# Altium PCB pcbDriverEsq.PcbDoc
Units mm, origin at the board's own origin, x right, y up, seen from the top; angles counter-clockwise.
Board outline 13.35 x 27.94 mm, 2 copper layers (Top Layer, Bottom Layer); 14 components, 11 nets, 49 pads, 11 vias.
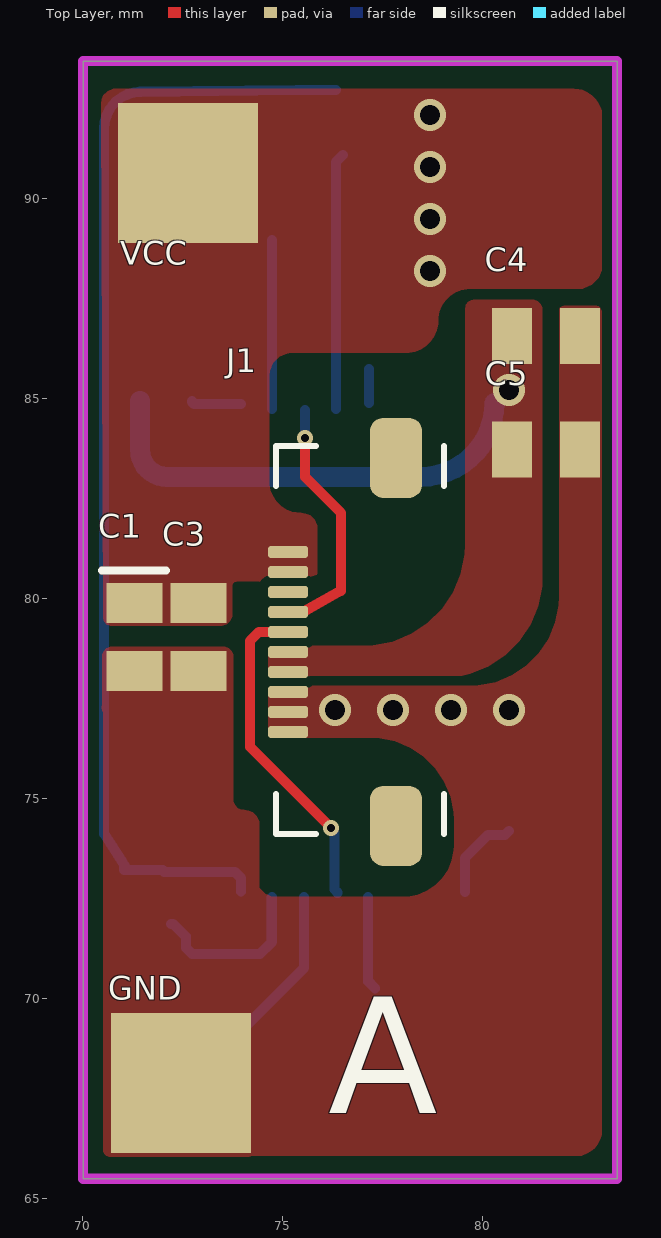
[diagram p0: Top Layer view]
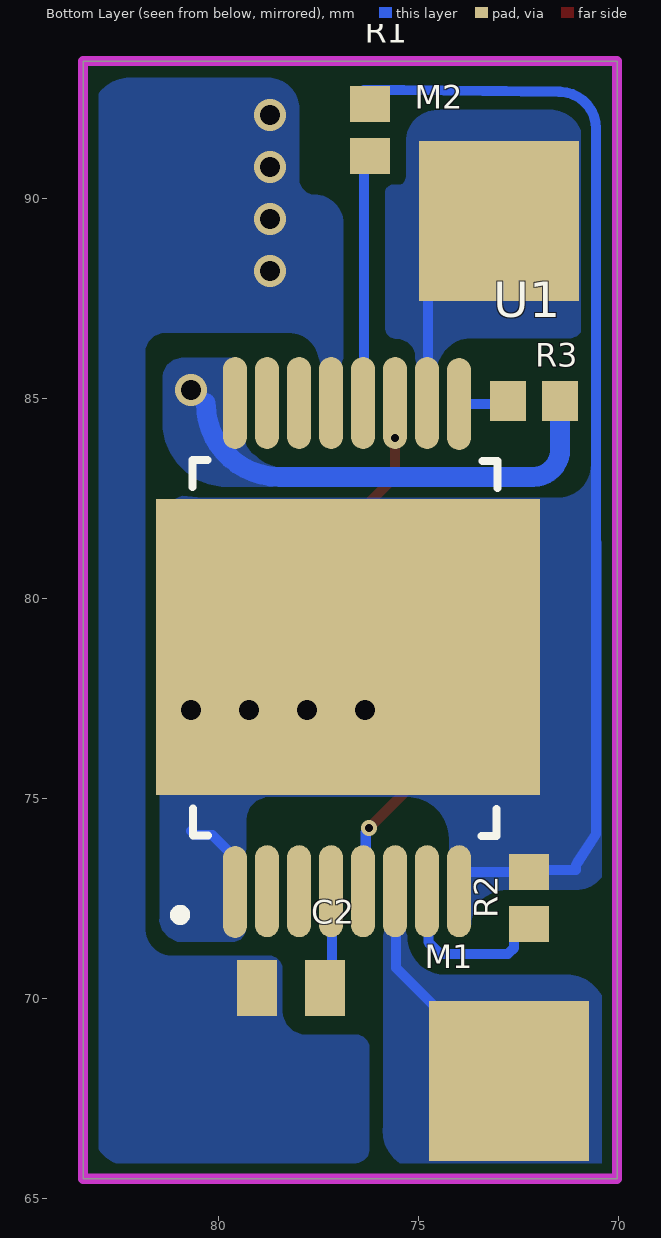
[diagram p1: Bottom Layer view, seen from below]
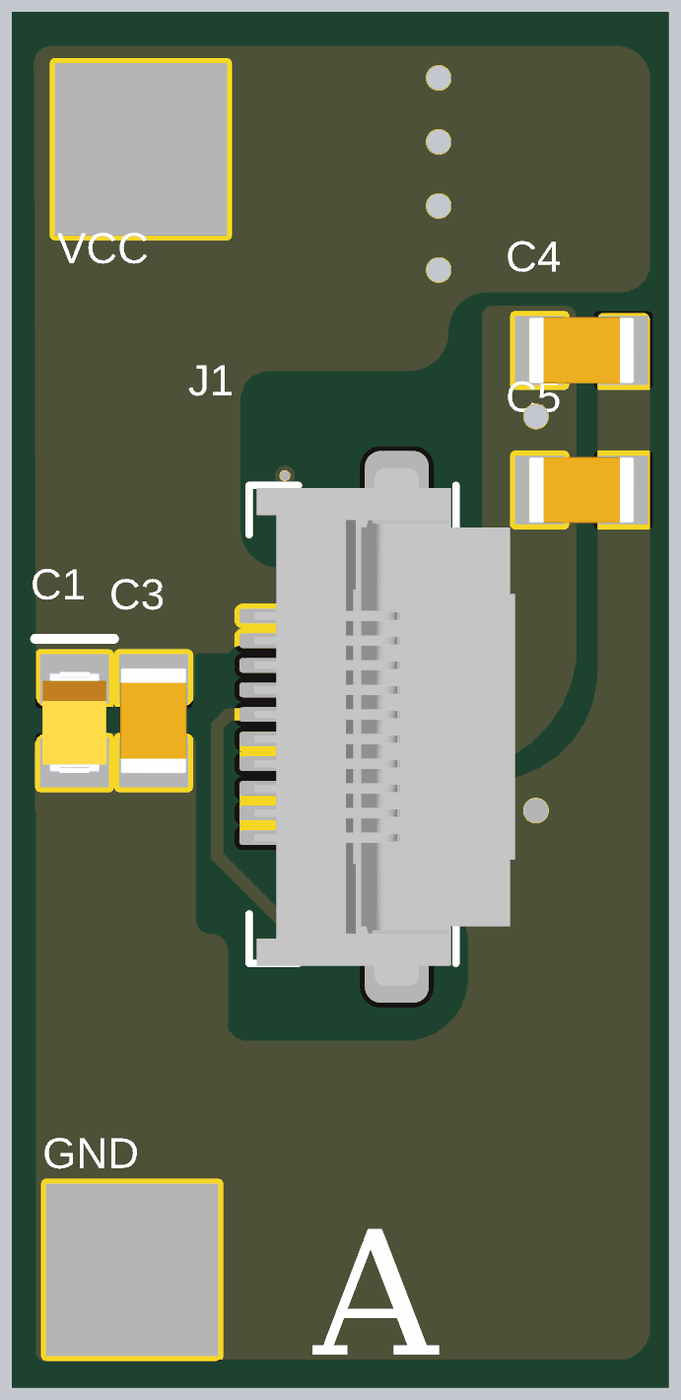
[diagram p2: 3D render of the assembled board from above, using the file's embedded part models]
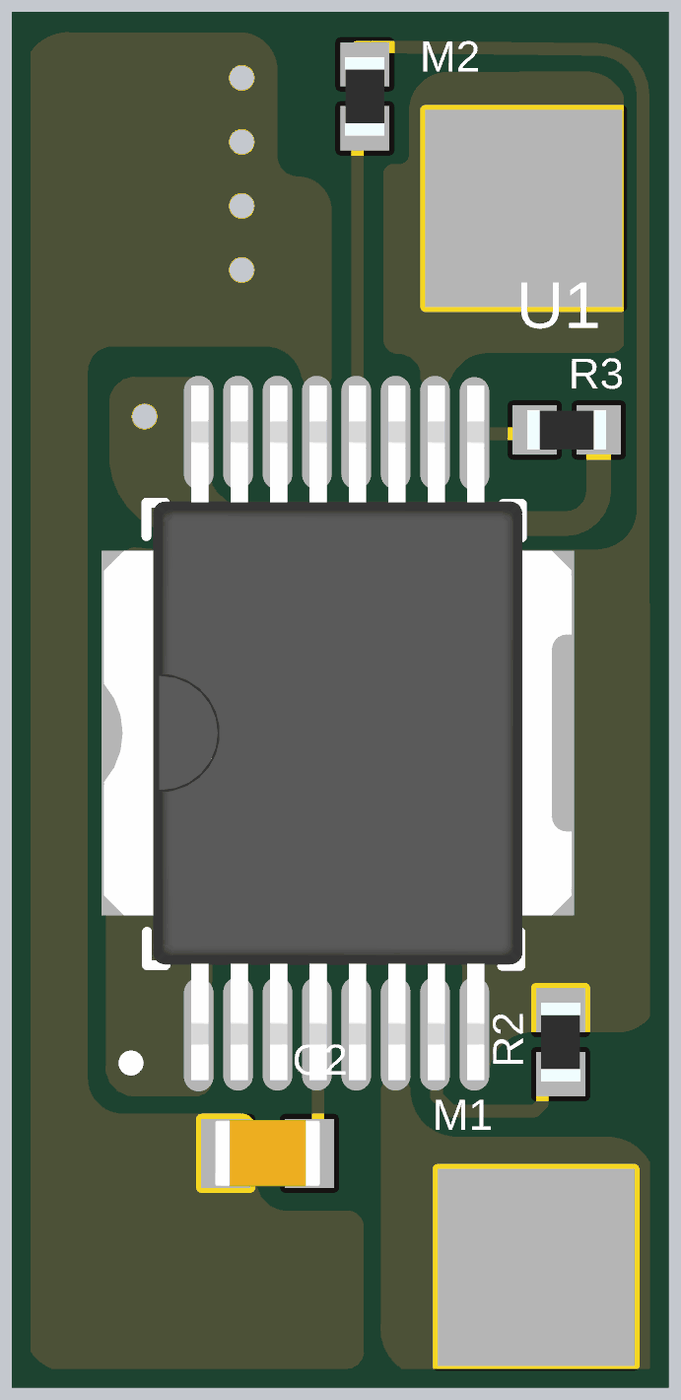
[diagram p3: 3D render of the assembled board from below, using the file's embedded part models]

## Layer stack, top to bottom
Top Solder: solder mask 0.0102, Solder Resist, Dk 3.5
Top Layer: signal copper 0.0356
Dielectric 1: dielectric 0.32, FR-4, Dk 4.8
Bottom Layer: signal copper 0.0356
Bottom Solder: solder mask 0.0102, Solder Resist, Dk 3.5

## Board outline
70.025,65.505 83.375,65.505 83.375,93.445 70.025,93.445

## Design rules (kind name [scope] priority, off if disabled: settings)
Clearance [All] p1: gap=0.254 ignorepadtopadclearanceinfootprint=FALSE except(0.1: Arc-Arc Arc-Track Arc-SMDPad Arc-THPad Arc-Via Track-Track Track-SMDPad Track-THPad Track-Via SMDPad-SMDPad)
PolygonConnect [All] p1: connectstyle=Direct reliefconductorwidth=0.254 reliefentries=4 polygonreliefangle="90 Angle" airgapwidth=0.254
RoutingVias [All] p1: holewidth=0.711 width=1.27 viastyle="Through Hole" minholewidth=0.711 minwidth=1.27 maxholewidth=0.711 maxwidth=1.27
SolderMaskExpansion [All] p1: expansion=0.102 istentingtop=FALSE
Width [All] p1: maxlimit=1 minlimit=0.254 preferedwidth=0.254 toplayer_maxwidth=0.254 minimp=50.000000 maximp=50.000000 favimp=50.000000
30 further rules are at their usual default settings.

## Components (designator, comment, footprint, x,y, rotation, side; value= is the part's Value field where it differs from the comment)
C1 "100uF" "TANTALUM C0805" 71.325,79.075 r270 top
C2 "0.1uF" C0805 78.175,70.275 r180 bottom
C3 "1 uF" C0805 72.9,79.05 r90 top
C4 "0.1uF" C0805 81.6,86.575 r0 top
C5 "10uF" C0805 81.6,83.725 r180 top
GND "Ground Pad" PAD_ALIMENTAÇÃO_MINI 72.475,67.9 r0 top (schematic designator GND1)
J1 "505278-1033" FPC_CON 76.75,78.925 r90 top
M1 "Motor Pad" PAD_MOTOR_MINI 72.725,67.95 r180 bottom
M2 "Motor Pad" PAD_MOTOR_MINI 72.975,89.45 r180 bottom
R1 "10kR" RESISTOR_0603 76.2,91.725 r270 bottom
R2 "22 kOhms" RESISTOR_0603 72.225,72.525 r270 bottom
R3 "22 kOhms" RESISTOR_0603 72.1,84.95 r0 bottom
U1 "L9958SBTR" "POWERSO16 (16_PINS)" 76.725,78.8 r90 bottom
VCC "Source Pad" PAD_ALIMENTAÇÃO_MINI 72.65,90.65 r0 top (schematic designator VCC1)

## Footprints (in the part's own frame and the unit in brackets; to place one, negate y for a bottom-side part, rotate by r counter-clockwise, add the part's x,y. Pads: shape width x height; smd on the part's side, far side on the other; paste and mask are expansions set on the pad)
C0805 [mm]
  rect 1x1.4 smd: 1(-0.85,-0.008) 2(0.85,-0.008)
  body extent -1.07,-0.68 1.07,0.67, height 0.9
FPC_CON [mm] "Small Outline IC (SOIC), 1.27 mm pitch; 8 pin, 4.90 mm L X 3.90 mm W X 1.75 mm H body"
  rrect50% 0.3x1 smd: 1(-2.25,1.6) 2(-1.75,1.6) 3(-1.25,1.6) 4(-0.75,1.6) 5(-0.25,1.6) 6(0.25,1.6) 7(0.75,1.6) 8(1.25,1.6) 9(1.75,1.6) 10(2.25,1.6)
  rrect50% 2x1.3 smd: MP1(-4.6,-1.1) MP2(4.6,-1.1)
  silkscreen extent -4.8,-2.3 4.9,1.9, body extent -5.25,-3.5 5.25,1.8, height 1.88
PAD_ALIMENTAÇÃO_MINI [mm]
  rect 3.5x3.5 smd: A(0,0)
PAD_MOTOR_MINI [mm]
  rect 4x4 smd: M(0,0)
"POWERSO16 (16_PINS)" [mm]
  oval 2.3x0.6 smd paste+0 mask+0: 1(-6.125,2.85) 2(-6.108,2.05) 3(-6.108,1.25) 4(-6.108,0.45) 5(-6.108,-0.35) 6(-6.108,-1.15) 7(-6.108,-1.95) 8(-6.108,-2.75) 9(6.075,-2.75) 10(6.1,-1.95) 11(6.1,-1.15) 12(6.1,-0.35) 13(6.1,0.45) 14(6.1,1.25) 15(6.1,2.05) 16(6.1,2.85)
  rect 7.4x9.6 smd paste+0 mask+0: 17(0,0.025)
  silkscreen extent -6.8,-3.71 4.68,4.33, body extent -7.05,-4.72 7.05,4.78
RESISTOR_0603 [mm]
  rect 0.9x1 smd: 1(-0.65,0) 2(0.65,0)
  body extent -0.8,-0.4 0.8,0.4, height 0.55
"TANTALUM C0805" [mm]
  rect 1x1.4 smd: 1(-0.824,-0.02) 2(0.876,-0.02)
  silkscreen extent -1.64,-0.82 -1.64,0.78, body extent -0.96,-0.67 1.09,0.63, height 1.2

## Part data
C1: library part F980J107MSA, "CAP TAN 100uF 6.3V 0805", Manufacturer=AVX, Operating Temperature="-55 C ~ 125 C", Package / Case="0805 (2012 Metric)", Supplier Part Number 1=581-F980J107MSA, Tolerance=20%, Voltage - Rated=6.3V, Category="Tantalum Capacitor", ComponentLink1Description=Datasheet, ComponentLink1URL=https://br.mouser.com/datasheet/2/40/AVX_F98%20DTSH%2008_16-1158749.pdf, ComponentLink2Description="Mouser Link", ComponentLink2URL=https://br.mouser.com/ProductDetail/AVX/F980J107MSA?qs=%2Fha2pyFaduiqmyJM1RWxJ6tWf%252BqxluChd36%252Bz6k56%252ByF7CmEPS5MIQ%3D%3D, Dieletric=Tantalum, ESR="8 Ohms using (100kHz)", Library Control - Checked Footprint=Yes, Library Control - Checked Schematic=Yes, Library Control - Last Update="27/06/2021 23:37", Library Control - Person that Checked Footprint=Nikaum, Library Control - Person that Checked Schematic=Nikaum, Library Control - Person that did the Last Update Footprint=Nikaum, Library Control - Person that did the Last Update Schematic=Nikaum, Library Ref=Capacitor, Part Number=F980J107MSA, Price="1=0.87, 10=0.646, 100=0.443 (USD)", Size / Dimension="2,00 L x 1,25 W x 0,80 H", Supplier 1=Mouser
C2 C4: library part C0805C104M3RACTU, "CAP CER 100nF 25V X7R 0805", Manufacturer=Kemet, Operating Temperature="-55 C ~ 125 C", Package / Case="0805(2012 mestric)", Supplier Part Number 1=80-C0805C104M3R, Tolerance=20%, Voltage - Rated="25 VDC", Category="Ceramic Capacitor", ComponentLink1Description=Datasheet, ComponentLink1URL=https://br.mouser.com/datasheet/2/212/KEM_C1002_X7R_SMD-1102033.pdf, ComponentLink2Description="Mouser Link", ComponentLink2URL=https://br.mouser.com/ProductDetail/KEMET/C0805C104M3RACTU?qs=jbCUrP3sAgSIdMuvv9W4Pg%3D%3D, Dieletric=X7R, ESR=-, Library Control - Checked Footprint=Yes, Library Control - Checked Schematic=Yes, Library Control - Last Update=25/08/22, Library Control - Person that Checked Footprint=Cage, Library Control - Person that Checked Schematic=Cage, Library Control - Person that did the Last Update Footprint=Cage, Library Control - Person that did the Last Update Schematic=Cage, Library Ref=Capacitor, Part Number=C0805C104M3RACTU, Price="1=0,13 10=0,064 100=0,037 1000=0,025 (USD)", Size / Dimension="1.25 mm W x 2 mm L x 0.78 mm H", Supplier 1=Mouser
C3: library part 08051C105K4T2A, "CAP CER 1uF 100V X7R 0805", Manufacturer="KYOCERA AVX", Operating Temperature="-55°C ~125ºC", Package / Case="0805(2012 Metric)", Supplier Part Number 1=581-08051C105K4T2A, Tolerance=10%, Voltage - Rated="100 VDC", Category="Ceramic capacitor", ComponentLink1Description=Datasheet, ComponentLink1URL=https://br.mouser.com/datasheet/2/40/AutoMLCC-777028.pdf, ComponentLink2Description="Mouser Link", ComponentLink2URL=https://br.mouser.com/ProductDetail/KYOCERA-AVX/08051C105K4T2A?qs=BZBei1rCqCBHLdlOVwQkfA%3D%3D, Dieletric=X7R, ESR=-, Library Control - Checked Footprint=Yes, Library Control - Checked Schematic=Yes, Library Ref=Capacitor, Part Number=08051C105K4T2A, Price="1=0,41 10=0,283 100=0,169 1000=0,107 (USD)", Size / Dimension="2 mm L  x 1.25 mm W x 1.25 mm H", Supplier 1=Mouser
C5: library part EMK212BB7106MG-T, "CAP CER 10uF 16V X7R 0805", Manufacturer="Taiyo Yuden", Operating Temperature=-55°C~+125°C, Package / Case=0805, Supplier Part Number 1=963-EMK212BB7106MG-T, Tolerance=20%, Voltage - Rated="16V DC", Category="Ceramic Capacitors", ComponentLink1Description=Datasheet, ComponentLink1URL=https://br.mouser.com/datasheet/2/396/mlcc02_e-1307760.pdf, ComponentLink2Description="Mouser Link", ComponentLink2URL=https://br.mouser.com/ProductDetail/Taiyo-Yuden/EMK212BB7106MG-T?qs=sGAEpiMZZMsh%252B1woXyUXj9%252BEWUGdOab8mJU%252BgghcgP8%3D, Dieletric=X7R, Library Control - Checked Footprint=Yes, Library Control - Checked Schematic=Yes, Library Control - Last Update=22/08/22, Library Control - Person that Checked Footprint=Cage, Library Control - Person that Checked Schematic=Cage, Library Control - Person that did the Last Update Footprint=Chico, Library Control - Person that did the Last Update Schematic=Cage, Library Ref=Capacitor, Part Number=EMK212BB7106MG-T, Price="1=0.42, 10=0.204, 100=0.175 (USD)", Size / Dimension="1.25mm X 2mm X 1.45mm", Supplier 1=Mouser
GND: library part "Ground Pad Mini Sumô", "GND PAD MINI SUMÔ", Cable AWG="20 / 18 (AWG)", Library Ref=Pads, Recomended Category="Mini Sumô", Size="3.5 x 3.5 (mm)"
J1: library part 505278-1033_BODY, "CONN FFC/FPC HORZ 10POS 0.50MM", Current Rating (Amps)=500mA, Manufacturer=Molex, Operating Temperature="-40°C ~ 85°C", Supplier Part Number 1=538-505278-1033, Category=Connectors, ComponentLink1Description=Datasheet, ComponentLink1URL=https://br.mouser.com/datasheet/2/276/2/5052781033_FFC_FPC_CONNECTORS-772019.pdf, ComponentLink2Description="Mouser Link", ComponentLink2URL=https://br.mouser.com/ProductDetail/Molex/505278-1033?qs=c8NFF48pVsDStgrQCBOSTg%3D%3D, Contact Length - Mating=0.50mm, Contact Material=Tin, Contact Type=FFC/FPC, Insulation Material="Liquid Crystal Polymer", Library Control - Checked Footprint=Yes, Library Control - Checked Schematic=Yes, Library Control - Last Project that Used=Follow-Final, Library Control - Last Update="24/04/2021 00:25", Library Control - Person that Checked Footprint=Lucas, Library Control - Person that Checked Schematic=Lucas, Library Control - Person that did the Last Update Footprint=Mateus(Dimas), Library Control - Person that did the Last Update Schematic=Mateus(Dimas), Library Ref=Connectors, Mounting Type="Right Angle", Number of Positions=10, Number of Rows=1, Part Number=505278-1033, Pitch=0.50mm, Price="1=0,51000, 10=0,42900, 100=0,33400 (USD)", Supplier 1=Mouser, Termination=SMD
M1 M2: library part "Motor Pad Mini Sumô", "MOTOR PAD MINI SUMÔ", Cable AWG="20 / 18 (AWG)", Library Ref=Pads, Recomended Category="Mini Sumô", Size="3.5 x 3.5 (mm)"
R1: library part RC0603JR-0710KL, "RES SMD 10K OHM 5% 1/10W 0603", Manufacturer=Yageo, Operating Temperature="- 55ºC ~ 155ºC", Package / Case="0603 (1608 Metric)", Power Rating="100 mW (1/10 W)", Resistor Type=Fixo, Supplier Part Number 1=603-RC0603JR-0710KL, Temperature Coefficient="100 PPM / C", Tolerance="5 %", Voltage Rating="75 V", Category="Thick Film Resistors - SMD", ComponentLink1Description="Mouser Link", ComponentLink1URL=https://br.mouser.com/ProductDetail/Yageo/RC0603JR-0710KL?qs=ksOUTF%2FWcd8D6T22BJkQ7g%3D%3D, ComponentLink2Description="Datsheet Link", ComponentLink2URL=https://br.mouser.com/datasheet/2/447/Yageo_03_18_2021_PYu_RC_Group_51_RoHS_L_11-2199992.pdf, Library Control - Checked Footprint=No, Library Control - Checked Schematic=Yes, Library Control - Last Update="21/06/21 14:15", Library Control - Person that Checked Schematic=Marcos, Library Control - Person that did the Last Update Footprint=Dalarme, Library Control - Person that did the Last Update Schematic=Marcos, Library Ref=Resistor, Part Number=RC0603JR-0710KL, Price="1=0,10, 10=0,015, 100=0,005 1000=0,0040 (USD)", Size / Dimension="1.6 mm L x  0.8 mm W x  0.45 mm H", Supplier 1=Mouser
R2 R3: library part CRGH0603F22K, "RES SMD 22K OHM 1% 1/5W 0603", Manufacturer="TE Connectivity / Holsworthy", Operating Temperature=-55C~155C, Package / Case="0603 (1608 metric)", Power Rating="200 mW (1/5 W)", Resistor Type=Fixo, Supplier Part Number 1=279-CRGH0603F22K, Temperature Coefficient="100 PPM / C", Tolerance=1%, Voltage Rating="50 V", Category="Thick Film Resistors", ComponentLink1Description="Mouser Link", ComponentLink1URL=https://br.mouser.com/ProductDetail/TE-Connectivity-Holsworthy/CRGH0603F22K?qs=j1jvDfvplqKqyIzG56xhJw%3D%3D, ComponentLink2Description=Datasheet, ComponentLink2URL=https://br.mouser.com/datasheet/2/418/6/ENG_DS_1773204_1_F-1140248.pdf, Library Ref=Resistor, Part Number=CRGH0603F22K, Price="1= 0.10, 10= 0.07, 100= 0.027 (USD)", Size / Dimension="0.45 mm x 1.6 mm x 0.8 mm (HxLxW)", Supplier 1=Mouser
U1: "IC MTR DRV (4V ~ 28V) (100 uA) POWERSO 16", Current - Output="100 uA", Current - Peak Output (Source/Sink)="5 uA / 100 uA", Logic Voltage - VIL, VIH="VIL = (-0.3 V ~ 0.8 V) / VIH = (2 V ~ VDD + 0.3 V)", Manufacturer=ST, Operating Supply Current="20 uA", Operating Temperature="-40°C ~ 150°C", Package / Case="POWERSO 16", Power Dissipation="625 mW", Rds On - Drain-Source Resistance="300 mOhms", Supplier Part Number 1=511-L9958SBTR, Voltage - Load="4V ~ 28V", Voltage - Supply="4.5 V ~ 5.5 V", Category=Driver, ComponentLink1Description="Mouser Link / ST Link", ComponentLink1URL=https://estore.st.com/en/l9958sbtr-cpn.html, ComponentLink2Description=Datasheet, ComponentLink2URL=https://www.st.com/resource/en/datasheet/l9958.pdf, Library Control - Checked Footprint=Yes, Library Control - Checked Schematic=Yes, Library Control - Last Update="21/06/2021 12:25", Library Control - Person that Checked Footprint=Pierre, Library Control - Person that Checked Schematic=Pierre, Library Control - Person that did the Last Update Footprint=Stéfany(Ster), Library Control - Person that did the Last Update Schematic=Pierre, Library Ref=Driver, Logic (IN-SD/High Low)=IN-SD, Output Configuration="Half Bridge (2)", Part Number=L9958SBTR, Price="1=5,51000, 10=4,95000, 100=4,06000 (USD)", Rise / Fall Time (Typ)="0.2 us / 3 us", Suplier Part Number 2=L9958SBTR, Supplier 1=Mouser, Technology="Power MOSFET"
VCC: library part "Source Pad Mini Sumô", "VCC PAD MINI SUMÔ", Cable AWG="20 / 18 (AWG)", Library Ref=Pads, Recomended Category="Mini Sumô", Size="3.5 x 3.5 (mm)"

## Via types
v1: diameter 0.8, hole 0.5, Top Layer to Bottom Layer, tented both sides, 9 vias
v2: diameter 0.4, hole 0.2, Top Layer to Bottom Layer, tented both sides, 2 vias

## Nets (pads, with @x,y where several pads share a name; then routed paths per layer and width w, separated by ;. In a path a pad name is that pad's centre, name@x,y a point inside that pad or via, vN(x,y) a via of type N, cw(c..) or ccw(c..) an arc to the next point about the centre after c; other vN are vias at no path point)
BAT: C1.1 C2.1 C3.2 J1.9 J1.10 U1.13 VCC.A | length 0.9
  Bottom Layer w0.254: U1.13 U1.13@77.175,85.75
  other v1: 78.7,88.2 78.7,89.5 78.7,90.8 78.7,92.1
CP: C2.2 U1.4 | length 2.3
  Bottom Layer w0.254: U1.4@77.15,72.542 77.15,70.442 C2.2
DI: R2.2 U1.7 | length 4.2
  Bottom Layer w0.254: R2.2 72.275,71.875 72.598,71.552 72.598,71.277 72.75,71.125 74.45,71.125 74.744,71.419 74.744,72.535 U1.7@74.75,72.542
DIR: J1.6 U1.5 | length 8.2
  Top Layer w0.254: J1.6 74.425,79.175 74.2,78.95 74.2,76.3 v2(76.222,74.278)
  Bottom Layer w0.254: v2(76.222,74.278) 76.222,74.238 76.309,74.152 76.309,72.733 U1.5@76.388,72.654
EN: R3.2 U1.9 | length 1.3
  Bottom Layer w0.254: R3.2 ccw(c72.825,84.95) 72.825,84.875 U1.9
GND: C1.2 C3.1 C4.2 C5.1 GND.A J1.1 J1.2 J1.3 R1.1 R2.1 U1.1 U1.8 U1.17 | length 30.6
  Bottom Layer w0.254: U1.8 73.975,73.015 73.815,73.175 72.054,73.175 72.004,73.225 71.05,73.225 71.054,73.229 71.054,73.344 71.014,73.407 70.55,74.127 70.55,91.754 cw(c71.475,91.754) 71.454,92.678 cw(c71.475,91.754) 71.475,92.679 75.361,92.722 76.199,92.724 R1.1@76.35,92.724 ; U1.1 79.575,73.525 80.146,74.096 80.571,74.096 80.675,74.2
  other v1: 76.325,77.225 77.775,77.225 79.225,77.225 80.675,77.225
OUT1: M1.M U1.6 | length 5.8
  Bottom Layer w0.254: M1.M 75.55,70.775 U1.6@75.55,72.542
OUT2: M2.M U1.10 | length 4.2
  Bottom Layer w0.254: U1.10@74.75,84.75 M2.M@74.75,88.975
PWM: J1.7 U1.11 | length 6.3
  Top Layer w0.254: J1.7 75.566,79.701 76.475,80.204 76.475,82.15 75.575,83.05 v2(75.575,84.025)
  Bottom Layer w0.254: v2(75.575,84.025) U1.11@75.575,84.725
REXT: R1.2 U1.12 | length 6.4
  Bottom Layer w0.254: U1.12@76.35,84.75 76.35,90.925 R1.2@76.525,91.1
VDD: C4.1 C5.2 J1.4 J1.5 R3.1 U1.16 | length 11.5
  Bottom Layer w0.5: R3.1 71.45,83.725 ccw(c72.125,83.725) 72.125,83.05 78.462,83.05 ccw(c78.462,84.896) 80.309,84.896
  other v1: 80.675,85.225
pads on no net: J1.8 J1.MP1 J1.MP2 U1.2 U1.3 U1.14 U1.15

## Polygon pours and split planes (outlines as drawn)
BAT on Top Layer "BAT_L01_P075" (solid, pour order 75): 75.25,86.15 78.1,86.15 ccw(c78.1,86.95) 78.9,86.95 cw(c79.693,86.957) 79.7,87.75 82.4,87.75 ccw(c82.387,88.363) 83,88.375 83,92.05 ccw(c82.3,92.05) 82.3,92.75 74.465,92.75 ccw(c74.465,90.21) 71.925,90.21 71.925,85.7
VDD on Top Layer "VDD_L01_P074" (solid, pour order 74): 81.5,85.125 81.5,87.225 ccw(c81.25,87.225) 81.25,87.475 79.775,87.475 ccw(c79.8,87.25) 79.575,87.225 79.575,85.325
GND on Top Layer "GND_L01_P073" (solid, pour order 73): 79.3,73.836 cw(c78.014,73.836) 78.014,72.55 77.525,72.55 ccw(c78.975,72.55) 78.975,71.1 83.025,71.1 cw(c83.025,71.125) 83,71.125 83,75.025
GND on Top Layer "GND_L01_P070" (solid, pour order 70): 79.687,77.825 ccw(c79.687,80.062) 81.925,80.063 81.925,87.223 cw(c82.05,87.2) 82.072,87.325 82.838,87.325 cw(c82.852,87.191) 82.987,87.206 82.987,77.357
GND on Top Layer "GND_L01_P068" (solid, pour order 68): 77.05,77.825 82.325,77.825 cw(c82.325,77.125) 83.025,77.125 83.025,73.7 cw(c82.35,73.7) 82.35,73.025 80.2,73.025 cw(c80.2,73.925) 79.3,73.925 79.3,74.46 ccw(c77.235,74.46) 77.235,76.525 77.1,76.525 cw(c77.1,76.825) 76.8,76.825
VDD on Top Layer "VDD_L01_P069" (solid, pour order 69): 75.162,78.825 77.035,78.825 ccw(c77.035,81.365) 79.575,81.365 79.575,85.325 cw(c80.087,85.288) 80.125,85.8 80.975,85.8 cw(c81,85.3) 81.5,85.325 81.5,80.565 cw(c78.96,80.565) 78.96,78.025 75.137,78.025
GND on Top Layer "GND_L01_P061" (solid, pour order 61): 73.95,66.05 cw(c73.975,66.05) 73.975,66.075 82.425,66.075 ccw(c82.344,66.719) 82.987,66.8 82.987,71.887 ccw(c82.325,71.888) 82.325,72.55 72.725,72.55
BAT on Top Layer "BAT_L01_P051" (solid, pour order 51): 74.675,85.375 74.675,85.575 cw(c75.25,85.575) 75.25,86.15 74.525,86.15 cw(c74.525,86.25) 74.425,86.25
GND on Top Layer "GND_L01_P046" (solid, pour order 46): 74.881,72.532 cw(c74.881,73.082) 74.331,73.082 74.331,72.482 ccw(c74.431,72.482) 74.431,72.382
GND on Top Layer "GND_L01_P043" (solid, pour order 43): 74.125,66.05 ccw(c74.125,66.35) 74.425,66.35 74.425,74.35 ccw(c74.05,74.35) 74.05,74.725 cw(c74.05,75) 73.775,75 73.775,77.5 ccw(c73.715,77.5) 73.715,77.56 70.5,77.56 cw(c70.5,77.535) 70.525,77.535 70.525,66.225 ccw(c70.7,66.225) 70.7,66.05
GND on Top Layer "GND_L01_P036" (solid, pour order 36): 73.775,77.775 73.775,77.225 cw(c73.6,77.225) 73.6,77.05 70.8,77.05 cw(c70.766,77.389) 70.55,77.125 cw(c70.797,77.298) 70.5,77.35 70.5,77.77
GND on Top Layer "GND_L01_P032" (solid, pour order 32): 73.525,78.8 cw(c73.525,78.55) 73.775,78.55 73.775,77.775 cw(c73.55,77.775) 73.55,77.55 70.775,77.55 cw(c70.775,77.825) 70.5,77.825 70.5,78.55 cw(c70.75,78.55) 70.75,78.8
BAT on Top Layer "BAT_L01_P031" (solid, pour order 31): 74.703,89.232 74.675,89.125 74.675,89.75 75.15,89.75 ccw(c75.457,89.033)
BAT on Top Layer "BAT_L01_P030" (solid, pour order 30): 73.95,92.75 78.8,92.75 cw(c78.8,92.375) 79.175,92.375 79.175,90.2 cw(c78.725,90.2) 78.725,89.75 73.924,89.75 cw(c73.924,89.956) 73.719,89.973
BAT on Top Layer "BAT_L01_P029" (solid, pour order 29): 70.75,79.325 73.45,79.325 ccw(c73.45,79.625) 73.75,79.625 73.75,80.325 cw(c73.85,80.325) 73.85,80.425 75.625,80.425 ccw(c75.625,80.675) 75.875,80.675 75.875,81.75 ccw(c75.475,81.75) 75.475,82.15 cw(c75.475,82.95) 74.675,82.95 74.675,92.4 ccw(c74.325,92.4) 74.325,92.75 70.85,92.75 ccw(c70.85,92.375) 70.475,92.373 70.524,79.551 ccw(c70.75,79.552)
GND on Top Layer "GND_L01_P027" (solid, pour order 27): 75.187,76.525 77.2,76.525 ccw(c77.2,76.7) 77.375,76.7 77.375,77.675 ccw(c77.2,77.675) 77.29,77.825 75.235,77.825 ccw(c75.325,77.675) 75.15,77.675
VDD on Top Layer "VDD_L01_P004" (solid, pour order 4): 74.75,78.025 cw(c74.75,78.125) 74.65,78.125 74.65,78.7 cw(c74.775,78.7) 74.775,78.825 75.55,78.825 cw(c75.55,78.725) 75.65,78.725 75.65,78.15 cw(c75.525,78.15) 75.525,78.025
GND on Top Layer "GND_L01_P009" (solid, pour order 9): 74.8,76.525 cw(c74.8,76.675) 74.65,76.675 74.65,77.7 cw(c74.775,77.7) 74.775,77.825 75.575,77.825 cw(c75.575,77.75) 75.65,77.75 75.65,76.6 cw(c75.575,76.6) 75.575,76.525
BAT on Top Layer "BAT_L01_P011" (solid, pour order 11): 74.85,80.525 cw(c74.85,80.725) 74.65,80.725 74.65,81.2 cw(c74.775,81.2) 74.775,81.325 75.575,81.325 cw(c75.575,81.25) 75.65,81.25 75.65,80.6 cw(c75.575,80.6) 75.575,80.525
BAT on Bottom Layer "BAT_L02_P080" (solid, pour order 80): 78.4,70 78.4,69.7 cw(c77.8,69.7) 77.8,69.1 76.55,69.1 ccw(c76.55,68.775) 76.225,68.775 76.225,66.275 ccw(c76.578,66.247) 76.55,65.893 78.635,65.893 ccw(c78.635,67.008) 79.75,67.008 79.75,69
OUT2 on Bottom Layer "OUT2_L02_P079" (solid, pour order 79): 75.825,89.725 75.825,90.15 ccw(c75.625,90.15) 75.625,90.35 75.5,90.35 cw(c75.5,90.55) 75.3,90.55 75.3,91.436 ccw(c74.516,91.436) 74.516,92.22 ccw(c74.516,92.129) 74.425,92.129 74.425,89.7
OUT2 on Bottom Layer "OUT2_L02_P076" (solid, pour order 76): 75.075,90.725 75.075,90.45 ccw(c75.5,90.45) 75.5,90.025 75.525,90.025 cw(c75.525,89.725) 75.825,89.725 75.825,86.8 cw(c75.525,86.8) 75.525,86.5 ccw(c75.525,86.028) 75.053,86.028 75.053,85.966 cw(c75.053,87.144) 73.875,87.144 73.875,90.325
OUT2 on Bottom Layer "OUT2_L02_P063" (solid, pour order 63): 75.075,85.575 75.075,91.5 ccw(c74.4,91.55) 74.45,92.225 71.7,92.225 ccw(c71.7,91.4) 70.875,91.4 70.875,86.875 ccw(c71.238,86.875) 71.238,86.512 73.712,86.512 cw(c73.713,85.725) 74.5,85.725
GND on Bottom Layer "GND_L02_P072" (solid, pour order 72): 70.675,83.35 ccw(c71.5,83.35) 71.5,82.525 71.94,82.525 71.94,82.315 cw(c71.15,82.315) 71.15,81.525 cw(c71.15,82.125) 70.55,82.125 70.55,83.45 ccw(c70.525,83.45) 70.525,83.475
VDD on Bottom Layer "VDD_L02_P071" (solid, pour order 71): 78.625,82.8 79.767,82.8 ccw(c79.767,84.419) 81.386,84.419 79.294,84.419 ccw(c79.294,84.4) 79.275,84.4 79.275,84.125 cw(c78.45,84.125) 78.45,83.3
VDD on Bottom Layer "VDD_L02_P028" (solid, pour order 28): 79.634,84.05 80.925,84.05 ccw(c80.925,84.511) 81.386,84.511 81.386,85.564 ccw(c80.863,85.502) 80.8,86.025 79.634,86.025
GND on Bottom Layer "GND_L02_P064" (solid, pour order 64): 80.4,82.525 80.897,82.573 cw(c80.625,81.735) 81.462,81.462 81.462,72.065 cw(c80.86,72.028) 80.897,71.425 79.65,71.425 cw(c79.65,71.775) 79.3,71.775 79.3,74.475 ccw(c78.725,74.475) 78.725,75.05 75.275,75.05 ccw(c75.275,74) 74.225,74 74.225,73.475 cw(c73.475,73.475) 73.475,72.725 71.05,72.725 cw(c71.05,73.525) 70.25,73.525 70.25,80.65 cw(c72.125,80.65) 72.125,82.525
GND on Bottom Layer "GND_L02_P066" (solid, pour order 66): 72.7,72.725 72.8,72.725 cw(c72.8,71.85) 73.675,71.85 ccw(c73.675,72.233) 74.058,72.233 74.058,72.997 ccw(c73.379,72.997) 73.379,73.675 72.95,73.675
BAT on Bottom Layer "BAT_L02_P065" (solid, pour order 65): 76.875,84.325 76.875,89.4 cw(c77.575,89.4) 77.575,90.1 ccw(c77.575,90.5) 77.975,90.5 77.975,92.25 cw(c78.75,92.25) 78.75,93.025 82.2,93.025 cw(c82.225,92.1) 83.15,92.125 83.15,66.775 cw(c82.2,66.775) 82.2,65.825 78.9,65.825 cw(c78.9,66.325) 78.4,66.325 78.4,70.75 cw(c78.725,70.75) 78.725,71.075 81.125,71.075 ccw(c81.125,71.775) 81.825,71.775 81.825,86.15 ccw(c81.325,86.15) 81.325,86.65 78.225,86.65 ccw(c78.225,85.9) 77.475,85.9 77.475,84.65 cw(c77.05,84.65) 77.05,84.225
OUT1 on Bottom Layer "OUT1_L02_P062" (solid, pour order 62): 75.275,72.3 75.275,71.55 cw(c74.325,71.55) 74.325,70.6 71.275,70.6 ccw(c71.275,69.625) 70.3,69.625 70.3,66.15 ccw(c70.725,66.15) 70.725,65.725 75,65.725 ccw(c74.887,66.713) 75.875,66.825 75.875,73.225 ccw(c75.7,73.15) 75.625,73.325

## Keep-outs
Keep-Out Layer:
  the board outline again, w0.254

## Silkscreen, mask and mechanical layers (free items; w line width, h text height)
Top Overlay:
  text "A" at 76.15,66.18 h5
BoardOutLine:
  lines w0.254: 70.025,65.505 70.025,93.445 ; 70.025,65.505 83.375,65.505 ; 70.025,65.505 70.025,93.445 ; 70.025,65.505 83.375,65.505 ; 70.025,93.445 83.375,93.445 ; 70.025,93.445 83.375,93.445 ; 83.375,65.505 83.375,93.445 ; 83.375,65.505 83.375,93.445